# EAGLE board Sega32K_DIP (EAGLE 7.4.0)
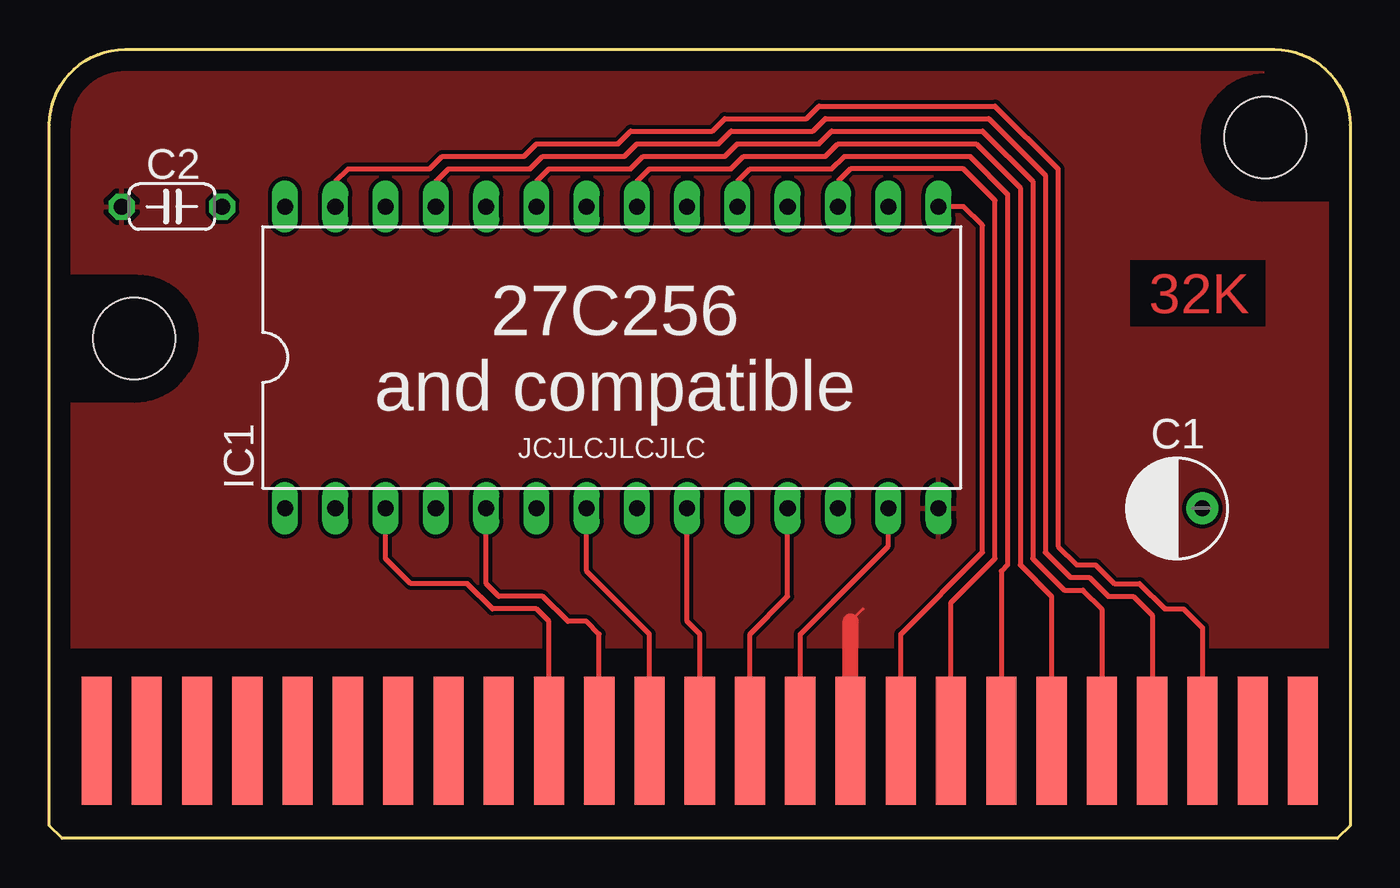
[diagram p0: board, top side]
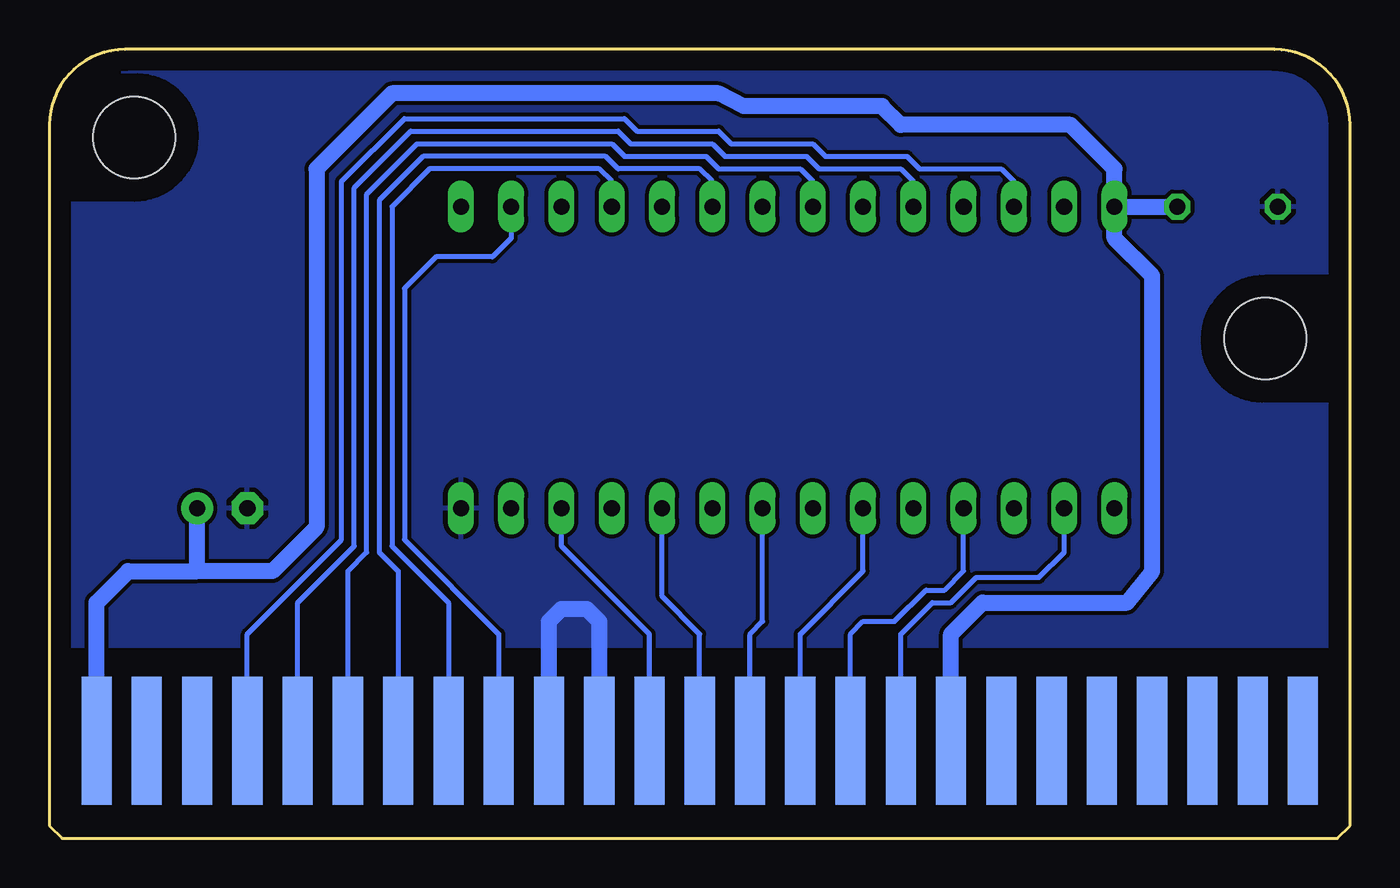
[diagram p1: board, bottom side, seen from below]

Size 65.72 x 39.85 mm. Coordinates in mm from the lower left corner, seen from the top.
Outline: 0.64,0 0,0.63 0,36.04 arc-90 3.81,39.85 61.91,39.85 arc-90 65.72,36.04 65.72,0.63 65.09,0 0.64,0
Copper layers (1*16): Top 0.035mm / dielectric 1.5mm / Bottom 0.035mm
Design rules "default": minimum track width 10mil, minimum drill 24mil, track to track 8mil, track to pad 8mil, pad to pad 8mil, via to via 8mil, smd to smd 8mil, copper to edge 40mil, drill to drill 8mil, minimum pad ring 10mil, minimum via ring 8mil, stop-mask expansion 4mil, vias tented up to drill 0mil, thermal gap 10mil
tRestrict: area 54.6,25.9 to 61.4,29.2; area 0,22.1 to 7.5,28.4; area 58.3,32.2 to 65.7,38.6
bRestrict: area 0,22.1 to 7.5,28.4; area 58.3,32.2 to 65.7,38.6

## Footprints (pad centres in the part's own frame; a part is rotated, then mirrored left to right if it is on the bottom)
E2,5-5 = drill 0.813 pad 1.6: + -1.27,0 | drill 0.813 pad 1.6 octagon: - 1.27,0
C050-024X044 = drill 0.813 octagon: 1 -2.54,0; 2 2.54,0
DIL28-6 = drill 0.813 long: 1 -16.51,-7.62; 2 -13.97,-7.62; 3 -11.43,-7.62; 4 -8.89,-7.62; 5 -6.35,-7.62; 6 -3.81,-7.62; 7 -1.27,-7.62; 8 1.27,-7.62; 9 3.81,-7.62; 10 6.35,-7.62; 11 8.89,-7.62; 12 11.43,-7.62; 13 13.97,-7.62; 14 16.51,-7.62; 15 16.51,7.62; 16 13.97,7.62; 17 11.43,7.62; 18 8.89,7.62; 19 6.35,7.62; 20 3.81,7.62; 21 1.27,7.62; 22 -1.27,7.62; 23 -3.81,7.62; 24 -6.35,7.62; 25 -8.89,7.62; 26 -11.43,7.62; 27 -13.97,7.62; 28 -16.51,7.62
CARD50PCB = smd 1.524 x 6.477 bottom: A1 -30.48,-1.587; A2 -27.94,-1.587; A3 -25.4,-1.587; A4 -22.86,-1.587; A5 -20.32,-1.587; A6 -17.78,-1.587; A7 -15.24,-1.587; A8 -12.7,-1.587; A9 -10.16,-1.587; A10 -7.62,-1.587; A11 -5.08,-1.587; A12 -2.54,-1.587; A13 0,-1.587; A14 2.54,-1.587; A15 5.08,-1.587; A16 7.62,-1.587; A17 10.16,-1.587; A18 12.7,-1.587; A19 15.24,-1.587; A20 17.78,-1.587; A21 20.32,-1.587; A22 22.86,-1.587; A23 25.4,-1.587; A24 27.94,-1.587; A25 30.48,-1.587 | smd 1.524 x 6.477: B1 -30.48,-1.587; B2 -27.94,-1.587; B3 -25.4,-1.587; B4 -22.86,-1.587; B5 -20.32,-1.587; B6 -17.78,-1.587; B7 -15.24,-1.587; B8 -12.7,-1.587; B9 -10.16,-1.587; B10 -7.62,-1.587; B11 -5.08,-1.587; B12 -2.54,-1.587; B13 0,-1.587; B14 2.54,-1.587; B15 5.08,-1.587; B16 7.62,-1.587; B17 10.16,-1.587; B18 12.7,-1.587; B19 15.24,-1.587; B20 17.78,-1.587; B21 20.32,-1.587; B22 22.86,-1.587; B23 25.4,-1.587; B24 27.94,-1.587; B25 30.48,-1.587 | hole 4.132: 28.575,28.892; -28.575,18.733

## Placement (x,y rotation side)
C1  [E2,5-5]  56.99,16.67 180 top
C2  [C050-024X044]  6.19,31.91 0 top
IC1  [DIL28-6]  28.42,24.29 0 top
U$1  ESMSPCB  [CARD50PCB]  32.86,6.51 0 top

## Library data of the parts
C1 C2 = resistor
IC1 U$1 = 2010.09.20

## Nets
+5V: C1.+ C2.2 IC1.28 U$1.A8 U$1.A25
A0: IC1.10 U$1.A13
A1: IC1.9 U$1.B13
A2: IC1.8 U$1.A12
A3: IC1.7 U$1.B12
A4: IC1.6 U$1.A11
A5: IC1.5 U$1.B11
A6: IC1.4 U$1.A10
A7: IC1.3 U$1.B10
A8: IC1.25 U$1.B22
A9: IC1.24 U$1.A21
A10: IC1.21 U$1.B20
A11: IC1.23 U$1.B21
A12: IC1.2 U$1.A9
A13: IC1.26 U$1.A22
A14: IC1.27 U$1.B23
CE: IC1.20 U$1.A19
D0: IC1.11 U$1.B14
D1: IC1.12 U$1.A14
D2: IC1.13 U$1.B15
D3: IC1.15 U$1.B17
D4: IC1.16 U$1.A17
D5: IC1.17 U$1.B18
D6: IC1.18 U$1.A18
D7: IC1.19 U$1.B19
GND: C1.- C2.1 IC1.14 U$1.A15 U$1.A16 U$1.B16
RD: IC1.22 U$1.A20

## Tracks (layer width: path | path; a pad name or v marks a point on that pad's centre or on a via)
+5V
  Bottom 0.813: U$1.A8 20.16,10.32 18.57,11.91 11.27,11.91 10,13.49 10,28.42 11.91,30.32 IC1.28 | U$1.A25 63.34,11.91 61.75,13.49 58.26,13.49 | 58.26,13.49 C1.+ | IC1.28 11.91,33.81 14.13,36.04 22.7,36.04 23.65,36.99 30.64,36.99 31.91,37.62 48.42,37.62 52.23,33.81 52.23,15.72 54.45,13.49 58.26,13.49 | IC1.28 C2.2
A0
  Bottom 0.254: U$1.A13 32.86,10.32 34.77,12.22 IC1.10
A1
  Top 0.254: U$1.B13 32.86,10.32 32.23,10.95 IC1.9
A2
  Bottom 0.254: U$1.A12 30.32,10.32 29.69,10.95 IC1.8
A3
  Top 0.254: U$1.B12 30.32,10.32 27.15,13.49 IC1.7
A4
  Bottom 0.254: U$1.A11 27.78,10.32 24.61,13.49 IC1.6
A5
  Top 0.254: U$1.B11 27.78,10.32 27.15,10.95 26.19,10.95 24.92,12.22 22.7,12.22 22.07,12.86 IC1.5
A6
  Bottom 0.254: U$1.A10 25.24,10.32 24.61,10.95 23.02,10.95 21.43,12.54 20.48,12.54 19.53,13.49 IC1.4
A7
  Top 0.254: U$1.B10 25.24,10.95 24.61,11.59 22.38,11.59 21.11,12.86 18.26,12.86 16.99,14.13 IC1.3
A8
  Top 0.254: IC1.25 19.53,33.18 20.16,33.81 24.29,33.81 24.92,34.45 29.05,34.45 29.69,35.08 33.81,35.08 34.45,35.72 38.58,35.72 39.21,36.35 47.47,36.35 50.32,33.5 50.32,14.45 51.59,13.18 52.55,13.18 53.5,12.22 54.77,12.22 55.72,11.27 U$1.B22
A9
  Bottom 0.254: U$1.A21 53.18,11.91 50.32,14.76 50.32,32.86 47.47,35.72 36.99,35.72 36.35,35.08 32.23,35.08 31.59,34.45 27.46,34.45 26.83,33.81 22.7,33.81 22.07,33.18 IC1.24
A10
  Top 0.254: IC1.21 29.69,33.18 30.32,33.81 34.45,33.81 35.08,34.45 39.21,34.45 39.85,35.08 46.83,35.08 49.05,32.86 49.05,13.81 50.64,12.22 U$1.B20
A11
  Top 0.254: IC1.23 24.61,33.18 25.24,33.81 29.37,33.81 30,34.45 34.13,34.45 34.77,35.08 38.89,35.08 39.53,35.72 47.15,35.72 49.69,33.18 49.69,14.13 51.28,12.54 52.23,12.54 53.18,11.59 U$1.B21
A12
  Bottom 0.254: U$1.A9 22.7,10.32 21.11,11.91 20.16,11.91 18.89,13.18 15.72,13.18 14.45,14.45 IC1.2
A13
  Bottom 0.254: U$1.A22 55.72,10.32 50.96,15.08 50.96,33.18 47.78,36.35 36.67,36.35 36.04,35.72 31.91,35.72 31.27,35.08 27.15,35.08 26.51,34.45 22.38,34.45 21.75,33.81 17.62,33.81 16.99,33.18 IC1.26
A14
  Top 0.254: IC1.27 14.45,33.18 15.08,33.81 19.21,33.81 19.84,34.45 23.97,34.45 24.61,35.08 28.73,35.08 29.37,35.72 33.5,35.72 34.13,36.35 38.26,36.35 38.89,36.99 47.78,36.99 50.96,33.81 50.96,14.76 51.91,13.81 52.86,13.81 53.82,12.86 55.09,12.86 56.36,11.59 57.31,11.59 58.26,10.64 U$1.B23
CE
  Bottom 0.254: IC1.20 32.23,33.18 32.86,33.81 36.99,33.81 37.62,34.45 46.83,34.45 49.05,32.23 49.05,14.45 48.1,13.49 U$1.A19
D0
  Top 0.254: U$1.B14 35.4,10.32 37.31,12.22 IC1.11
D1
  Bottom 0.254: U$1.A14 35.4,10.32 39.85,14.76 IC1.12
D2
  Top 0.254: U$1.B15 37.94,10.32 42.39,14.76 IC1.13
D3
  Top 0.254: U$1.B17 43.02,10.32 47.15,14.45 47.15,30.96 46.2,31.91 IC1.15
D4
  Bottom 0.254: IC1.16 42.39,30.32 43.34,29.37 46.2,29.37 47.78,27.78 47.78,15.08 43.02,10.32 U$1.A17
D5
  Top 0.254: U$1.B18 45.56,11.91 47.78,14.13 47.78,32.23 46.2,33.81 40.48,33.81 39.85,33.18 IC1.17
D6
  Bottom 0.254: IC1.18 37.31,33.18 37.94,33.81 46.51,33.81 48.42,31.91 48.42,14.76 45.56,11.91 U$1.A18
D7
  Top 0.254: IC1.19 34.77,33.18 35.4,33.81 39.53,33.81 40.16,34.45 46.51,34.45 48.42,32.54 48.42,13.81 48.1,13.49 U$1.B19
GND
  Top 0.152: 40.48,10.95 41.12,11.59
  Top 0.813: U$1.A16 40.48,10.95
  Bottom 0.813: U$1.A16 40.48,10.95 39.85,11.59 38.58,11.59 37.94,10.95 U$1.A15
  pour Top: -0.79,9.68 66.52,9.68 66.52,40.8 -0.79,40.8
  pour Bottom: -2.06,9.68 67.15,9.68 67.15,41.43 -2.06,41.43
RD
  Bottom 0.254: U$1.A20 50.64,13.49 49.69,14.45 49.69,32.54 47.15,35.08 37.31,35.08 36.67,34.45 32.54,34.45 31.91,33.81 27.78,33.81 27.15,33.18 IC1.22

## Text on the board
Top: 32K
tPlace: 27C256 / and compatible | JCJLCJLCJLC
tStop: ICHIGO / for SMSPower!